# Altium PCB main_pcb.PcbDoc
Units mm, origin at the board's own origin, x right, y up, seen from the top; angles counter-clockwise.
Board outline 111 x 177 mm, 2 copper layers (Top Layer, Bottom Layer); 23 components, 96 nets, 260 pads, 1 vias.
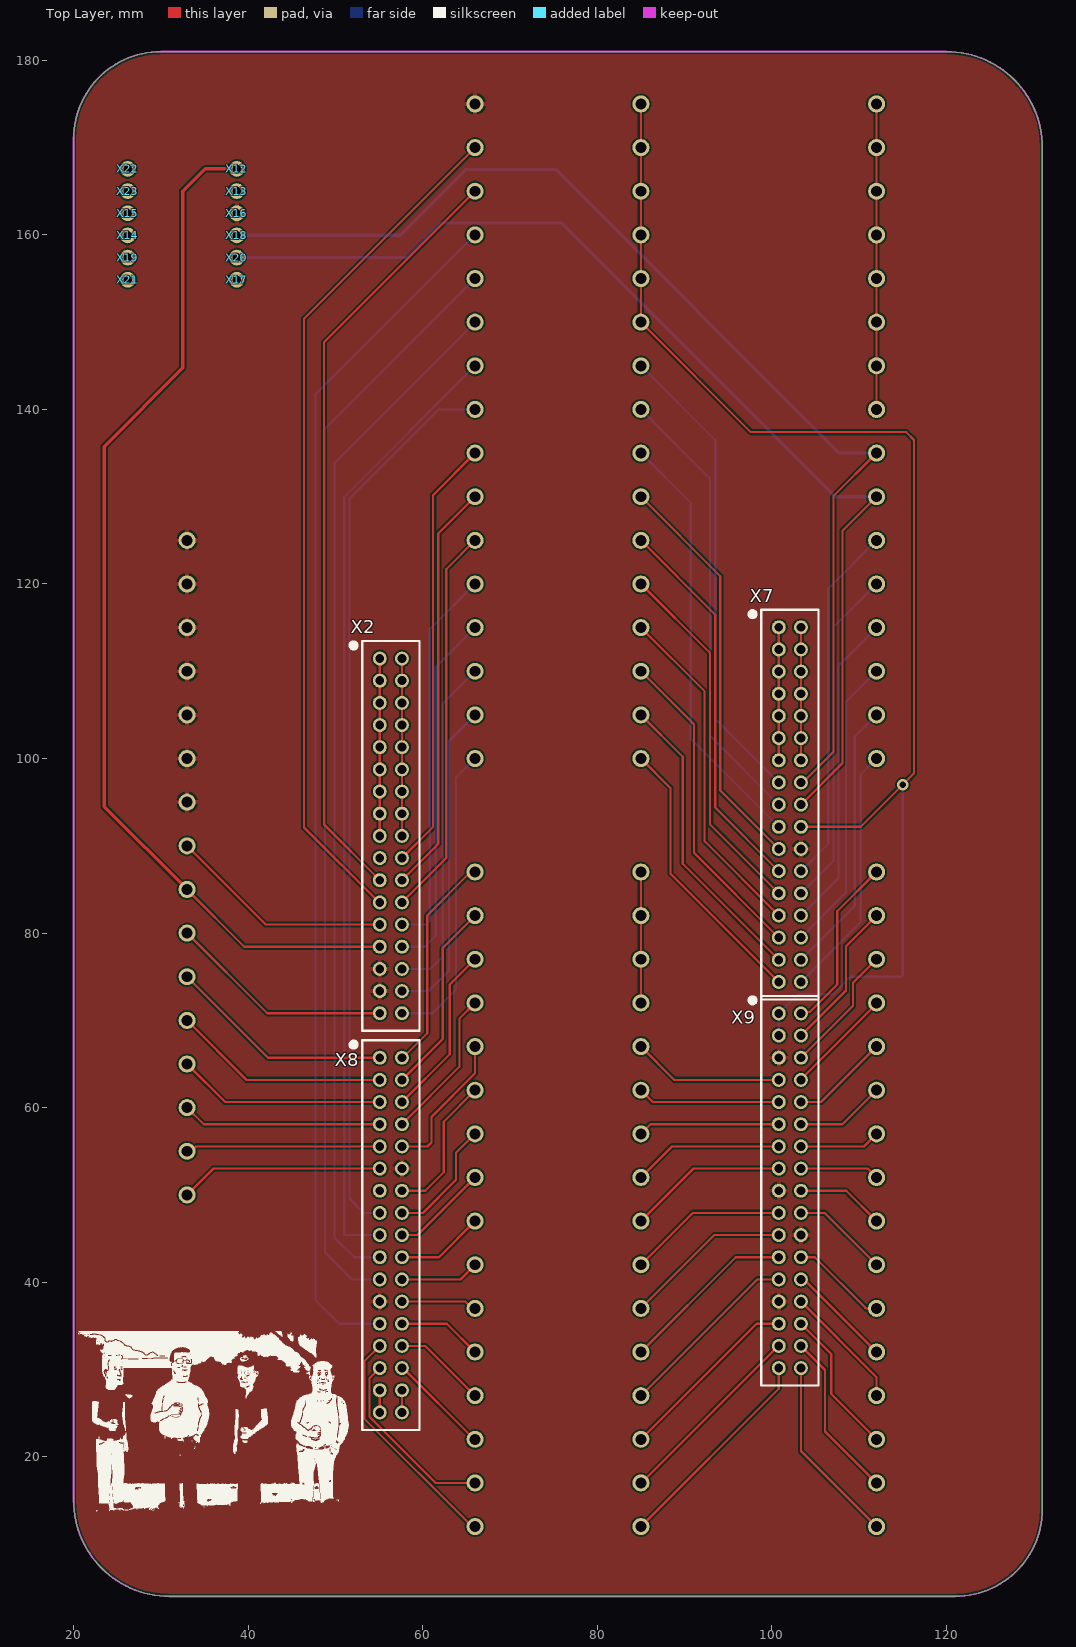
[diagram p0: Top Layer view]
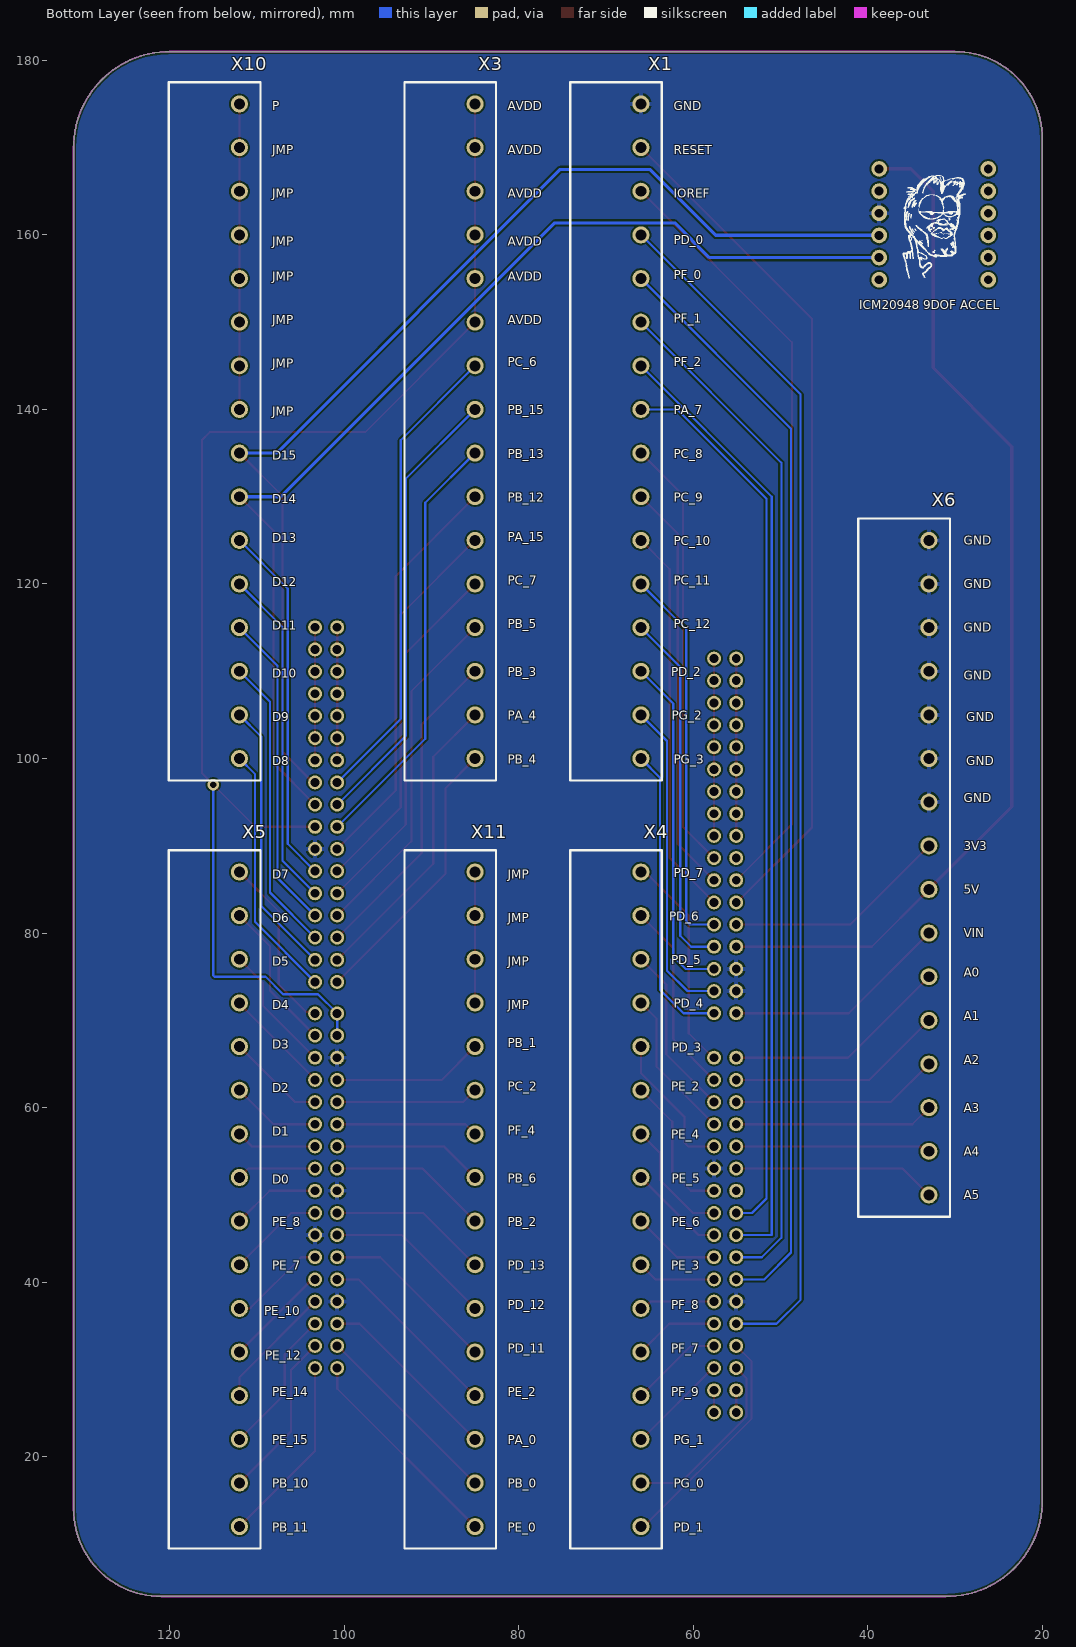
[diagram p1: Bottom Layer view, seen from below]

## Layer stack, top to bottom
Top Solder: solder mask 0.0102, Solder Resist, Dk 3.5
Top Layer: signal copper 0.0356
Dielectric 1: dielectric 0.32, FR-4, Dk 4.8
Bottom Layer: signal copper 0.0356
Bottom Solder: solder mask 0.0102, Solder Resist, Dk 3.5

## Board outline
30,181 120,181 cw(c120,170) 131,170 131,14 cw(c121,14) 121,4 31,4 cw(c31,15) 20,15 20,171 cw(c30,171)

## Design rules (kind name [scope] priority, off if disabled: settings)
BoardOutlineClearance [All] p1: gap=0.3 ignorepadtopadclearanceinfootprint=FALSE except(0.4: Arc-SplitBarrior Arc-SplitContinuation Track-SplitBarrior Track-SplitContinuation SMDPad-SplitBarrior SMDPad-SplitContinuation THPad-SplitBarrior THPad-SplitContinuation Via-SplitBarrior Via-SplitContinuation Fill-SplitBarrior Fill-SplitContinuation Poly-SplitBarrior Poly-SplitContinuation Region-SplitBarrior Region-SplitContinuation Text-SplitBarrior Text-SplitContinuation)
Clearance "Clearance Different Nets" [All] p1: gap=0.2 ignorepadtopadclearanceinfootprint=FALSE except(0.089: Arc-Arc Arc-Track Arc-SMDPad Track-Track Track-SMDPad; 0.127: SMDPad-SMDPad SMDPad-Via THPad-Via Via-Via; 0.254: Arc-Via Arc-Text Track-Via Track-Text SMDPad-Text THPad-Text Via-Text Fill-Text Poly-Text Region-Text Text-Text; 0.5: THPad-THPad Via-Hole)
Clearance "Clearance Same Nets" [All] p2: gap=0.2 ignorepadtopadclearanceinfootprint=FALSE except(0.089: Arc-Arc Arc-Track Arc-SMDPad Track-Track Track-SMDPad SMDPad-SMDPad; 0.127: SMDPad-Via THPad-Via; 0.254: Arc-Via Arc-Text Track-Via Track-Text SMDPad-Text THPad-Text Via-Via Via-Text Fill-Text Poly-Text Region-Text Text-Text)
Clearance "Clearance Bottom Layer" [OnLayer('Bottom Layer')] p3: gap=0.203 ignorepadtopadclearanceinfootprint=TRUE except(0.254: Arc-Text Track-Text SMDPad-Text THPad-Text Via-Text Fill-Text Poly-Text Region-Text Text-Text)
Clearance "Clearance Top Layer" [OnLayer('Top Layer')] p4: gap=0.203 ignorepadtopadclearanceinfootprint=TRUE except(0.254: Arc-Text Track-Text SMDPad-Text THPad-Text Via-Text Fill-Text Poly-Text Region-Text Text-Text)
HoleSize [All] p1: absolutevalues=TRUE maxlimit=6.3 minlimit=0.2 maxpercent=80.000 minpercent=20.000
MinimumAnnularRing [All] p1: minimumring=0.13
MinimumSolderMaskSliver [All] p1: minsoldermaskwidth=0.1
PolygonConnect PolygonConnect_1 [All] p1: thpad.connectstyle=Relief thpad.reliefconductorwidth=0.508 thpad.reliefentries=4 thpad.polygonreliefangle="90 Angle" thpad.airgapwidth=0.254 smdpad.connectstyle=Relief smdpad.reliefconductorwidth=0.508 smdpad.reliefentries=4 smdpad.polygonreliefangle="90 Angle" smdpad.airgapwidth=0.254 via.connectstyle=Direct via.reliefconductorwidth=0.508 via.reliefentries=4 via.polygonreliefangle="90 Angle" via.airgapwidth=0.254
RoutingCorners [All] p1: cornerstyle=Round minsetback=2.54 maxsetback=2.54
RoutingVias [All] p1: holewidth=0.5 width=1 viastyle="Through Hole" minholewidth=0.2 minwidth=0.35 maxholewidth=1 maxwidth=2
SilkToSilkClearance [All] p1: silktosilkclearance=0.1
SilkToSolderMaskClearance [IsPad] p1: minsilkscreentomaskgap=0.1 clearancetoexposedcopper=TRUE
SolderMaskExpansion [All] p1: expansion=0.102 istentingtop=FALSE
Width [All] p1: maxlimit=2.54 minlimit=0.089 preferedwidth=0.381
25 further rules are at their usual default settings.

## Components (designator, comment, footprint, x,y, rotation, side; value= is the part's Value field where it differs from the comment)
X1 "TERM BLOCK 16POS 45DEG 5MM PCB" PHEONIX-1988943 66,100 r0 bottom
X2 "" 2x17PinHeader_0.1in 55.08,111.46 r270 top
X3 "TERM BLOCK 16POS 45DEG 5MM PCB" PHEONIX-1988943 85,100 r0 bottom
X4 "TERM BLOCK 16POS 45DEG 5MM PCB" PHEONIX-1988943 66,12 r0 bottom
X5 "TERM BLOCK 16POS 45DEG 5MM PCB" PHEONIX-1988943 112,12 r0 bottom
X6 "TERM BLOCK 16POS 45DEG 5MM PCB" PHEONIX-1988943 33,50 r0 bottom
X7 "" 2x17PinHeader_0.1in 100.8,115.04 r270 top
X8 "" 2x17PinHeader_0.1in 55.08,65.72 r270 top
X9 "" 2x17PinHeader_0.1in 100.8,70.8 r270 top
X10 "TERM BLOCK 16POS 45DEG 5MM PCB" PHEONIX-1988943 112,100 r0 bottom
X11 "TERM BLOCK 16POS 45DEG 5MM PCB" PHEONIX-1988943 85,12 r0 bottom
X12 "GenericPinHeader(0.1in)" GenericPinHeader(.1in) 38.7,167.56 r0 top
X13 "GenericPinHeader(0.1in)" GenericPinHeader(.1in) 38.7,165.02 r0 top
X14 "GenericPinHeader(0.1in)" GenericPinHeader(.1in) 26.2,159.94 r0 top
X15 "GenericPinHeader(0.1in)" GenericPinHeader(.1in) 26.2,162.48 r0 top
X16 "GenericPinHeader(0.1in)" GenericPinHeader(.1in) 38.7,162.48 r0 top
X17 "GenericPinHeader(0.1in)" GenericPinHeader(.1in) 38.7,154.86 r0 top
X18 "GenericPinHeader(0.1in)" GenericPinHeader(.1in) 38.7,159.94 r0 top
X19 "GenericPinHeader(0.1in)" GenericPinHeader(.1in) 26.2,157.4 r0 top
X20 "GenericPinHeader(0.1in)" GenericPinHeader(.1in) 38.7,157.4 r0 top
X21 "GenericPinHeader(0.1in)" GenericPinHeader(.1in) 26.2,154.86 r0 top
X22 "GenericPinHeader(0.1in)" GenericPinHeader(.1in) 26.2,167.56 r0 top
X23 "GenericPinHeader(0.1in)" GenericPinHeader(.1in) 26.2,165.02 r0 top

## Footprints (in the part's own frame and the unit in brackets; to place one, negate y for a bottom-side part, rotate by r counter-clockwise, add the part's x,y. Pads: shape width x height; smd on the part's side, far side on the other; paste and mask are expansions set on the pad)
2x17PinHeader_0.1in [mm] "Generic 2x17 (34pin) 0.1mm pitch pin header"
  round 1.6 hole 1.02: 1(0,0) 2(2.54,0) 3(5.08,0) 4(7.62,0) 5(10.16,0) 6(12.7,0) 7(15.24,0) 8(17.78,0) 9(20.32,0) 10(22.86,0) 11(25.4,0) 12(27.94,0) 13(30.48,0) 14(33.02,0) 15(35.56,0) 16(38.1,0) 17(40.64,0) 18(40.64,2.54) 19(38.1,2.54) 20(35.56,2.54) 21(33.02,2.54) 22(30.48,2.54) 23(27.94,2.54) 24(25.4,2.54) 25(22.86,2.54) 26(20.32,2.54) 27(17.78,2.54) 28(15.24,2.54) 29(12.7,2.54) 30(10.16,2.54) 31(7.62,2.54) 32(5.08,2.54) 33(2.54,2.54) 34(0,2.54)
  silkscreen extent -2,-3.07 42.64,4.54
GenericPinHeader(.1in) [mm] "Generic .1in (2.54mm) pin header"
  round 1.8 hole 1.016: 1(0,0)
  body extent -1.27,-1.27 1.27,1.27, height 9.5
PHEONIX-1988943 [mm] "TERM BLOCK 16POS 45DEG 5MM PCB"
  round 1.95 hole 1.25: 1(0,0) 2(0,-5) 3(0,-10) 4(0,-15) 5(0,-20) 6(0,-25) 7(0,-30) 8(0,-35) 9(0,-40) 10(0,-45) 11(0,-50) 12(0,-55) 13(0,-60) 14(0,-65) 15(0,-70) 16(0,-75)
  silkscreen extent -2.4,-77.5 8.1,2.5

## Part data
X1 X3 X4 X5 X6 X10 X11: library part PHEONIX-1988943, "16 Position Wire to Board Terminal Block 45° (135°) Angle with Board 0.197\" (5.00mm) Through Hole", ComponentLink1Description=DIGIKEY, ComponentLink1URL=https://www.digikey.com/en/products/detail/phoenix-contact/1988943/950906
X2 X7 X8 X9: library part 2x17_0.1in, "Generic 2x17 0.1in pitch pin header"
X12 X13 X14 X15 X16 X17 X18 X19 X20 X21 X22 X23: "Generic .1in(2.54mm) pitch pin header"

## Via types
v1: diameter 1.27, hole 0.711, Top Layer to Bottom Layer, 1 vias

## Nets (pads, with @x,y where several pads share a name; then routed paths per layer and width w, separated by ;. In a path a pad name is that pad's centre, name@x,y a point inside that pad or via, vN(x,y) a via of type N, cw(c..) or ccw(c..) an arc to the next point about the centre after c; other vN are vias at no path point)
+3V3: X2.13 X6.9 | length 25.8
  Top Layer w0.254: X6.9 42.02,80.98 X2.13
+5V: X2.14 X6.8 X12.1 | length 119.7
  Top Layer w0.254: X6.8 39.56,78.44 X2.14
  Top Layer w0.381: X6.8 23.5,94.5 23.5,135.75 32.5,144.75 32.5,165 35.06,167.56 X12.1
AVDD: X3.11 X3.12 X3.13 X3.14 X3.15 X3.16 X7.25 X9.1 X9.2 | length 156
  Top Layer w0.254: X3.16 X3.15 X3.14 X3.13 X3.12 X3.11 97.6,137.4 115.4,137.4 116.3,136.5 116.3,98.3 v1(115,97) 110.18,92.18 X7.25
  Bottom Layer w0.254: X9.2 X9.1 103,73 107,73 109,75 114.851,75 115,75.149 v1(115,97)
GND: X1.16 X2.15 X2.16 X6.10 X6.11 X6.12 X6.13 X6.14 X6.15 X6.16 X7.24 X8.12 X8.29 X9.3 X9.9 X9.14 X9.24 X16.1
IOREF: X1.14 X2.11 | length 88.7
  Top Layer w0.254: X2.11 48.7,92.44 48.7,147.7 X1.14
NetX2_1: X2.1 X2.2 X2.3 X2.4 X2.5 X2.6 X2.7 X2.8 X2.9 | length 20.3
  Top Layer w0.254: X2.9 X2.8 X2.7 X2.6 X2.5 X2.4 X2.3 X2.2 X2.1
NetX2_26: X2.26 X2.27 X2.28 X2.29 X2.30 X2.31 X2.32 X2.33 X2.34 | length 20.3
  Top Layer w0.254: X2.26 X2.27 X2.28 X2.29 X2.30 X2.31 X2.32 X2.33 X2.34
NetX7_1: X7.1 X7.2 X7.3 X7.4 X7.5 X7.6 X7.7 | length 15.2
  Top Layer w0.254: X7.7 X7.6 X7.5 X7.4 X7.3 X7.2 X7.1
NetX7_28: X7.28 X7.29 X7.30 X7.31 X7.32 X7.33 X7.34 | length 15.2
  Top Layer w0.254: X7.28 X7.29 X7.30 X7.31 X7.32 X7.33 X7.34
NetX8_16: X8.16 X8.17 | length 2.5
  Top Layer w0.254: X8.17 X8.16
NetX8_18: X8.18 X8.19 | length 2.5
  Top Layer w0.254: X8.18 X8.19
NetX10_9: X10.9 X10.10 X10.11 X10.12 X10.13 X10.14 X10.15 X10.16 | length 35
  Top Layer w0.254: X10.9 X10.10 X10.11 X10.12 X10.13 X10.14 X10.15 X10.16
NetX11_13: X11.13 X11.14 X11.15 X11.16 | length 15
  Top Layer w0.254: X11.13 X11.14 X11.15 X11.16
PA_0: X9.15 X11.3 | length 21.3
  Top Layer w0.254: X11.3 98.24,35.24 X9.15
PA_3/A0: X6.6 X8.1 | length 25.9
  Top Layer w0.254: X6.6 42.28,65.72 X8.1
PA_4: X3.2 X7.16 | length 34.6
  Top Layer w0.254: X3.2 89.8,100.2 89.8,87.94 X7.16
PA_5/D13: X7.23 X10.6 | length 41.5
  Bottom Layer w0.254: X7.23 106.469,90.229 106.469,119.469 X10.6
PA_6/D12: X7.22 X10.5 | length 39
  Bottom Layer w0.254: X7.22 107.053,88.273 107.053,115.053 X10.5
PA_7: X1.9 X8.8 | length 103
  Bottom Layer w0.254: X8.8 53.26,47.94 51.6,49.6 51.6,129.774 61.826,140 X1.9
PA_7/D11: X7.21 X10.4 | length 36.6
  Bottom Layer w0.254: X7.21 107.637,86.317 107.637,110.637 X10.4
PA_15: X3.6 X7.12 | length 44.4
  Top Layer w0.254: X3.6 93.517,116.483 93.517,94.383 X7.12
PB_0: X9.16 X11.2 | length 22.3
  Top Layer w0.254: X11.2 85.05,17 100.75,32.7 X9.16
PB_1: X9.4 X11.12 | length 17.4
  Top Layer w0.254: X11.12 88.82,63.18 X9.4
PB_2: X9.8 X11.8 | length 18.3
  Top Layer w0.254: X11.8 91.02,53.02 X9.8
PB_3: X3.3 X7.15 | length 37.1
  Top Layer w0.254: X3.3 91.1,103.9 91.1,89.18 X7.15
PB_4: X3.1 X7.17 | length 32.1
  Top Layer w0.254: X3.1 88.4,96.6 88.4,86.8 X7.17
PB_5: X3.4 X7.14 | length 39.5
  Top Layer w0.254: X3.4 92.3,107.7 92.3,90.52 X7.14
PB_6: X9.7 X11.9 | length 17.3
  Top Layer w0.254: X11.9 88.56,55.56 X9.7
PB_8/D15: X7.27 X10.8 X18.1 | length 131.3
  Top Layer w0.254: X7.27 103.56,97.26 107.053,100.753 107.053,130.053 X10.8
  Bottom Layer w0.381: X18.1 57.44,159.94 65,167.5 75.25,167.5 107.75,135 X10.8
PB_9/D14: X7.26 X10.7 X20.1 | length 126.8
  Top Layer w0.254: X7.26 108.1,99.48 108.1,126.1 X10.7
  Bottom Layer w0.381: X20.1 58.15,157.4 62.115,161.365 75.885,161.365 107.25,130 X10.7
PB_10: X5.2 X9.19 | length 19.3
  Top Layer w0.254: X9.19 106.1,29.94 106.1,22.9 X5.2
PB_11: X5.1 X9.18 | length 21.7
  Top Layer w0.254: X9.18 103.34,20.66 X5.1
PB_12: X3.7 X7.11 | length 46.9
  Top Layer w0.254: X3.7 94.101,120.899 94.101,96.339 X7.11
PB_13: X3.8 X7.10 | length 49.4
  Bottom Layer w0.254: X3.8 90.7,129.3 90.7,102.28 X7.10
PB_15: X3.9 X7.9 | length 51.8
  Bottom Layer w0.254: X3.9 92.933,132.067 92.933,102.587 X7.9
PC_0/A1: X6.5 X8.2 | length 24.9
  Top Layer w0.254: X6.5 39.82,63.18 X8.2
PC_2: X9.5 X11.11 | length 16.4
  Top Layer w0.254: X11.11 86.36,60.64 X9.5
PC_3/A2: X6.4 X8.3 | length 23.9
  Top Layer w0.254: X6.4 37.36,60.64 X8.3
PC_6: X3.10 X7.8 | length 54.3
  Bottom Layer w0.254: X3.10 93.517,136.483 93.517,104.543 X7.8
PC_7: X3.5 X7.13 | length 42
  Top Layer w0.254: X3.5 92.933,112.067 92.933,92.427 X7.13
PC_8: X1.8 X2.25 | length 49.9
  Top Layer w0.254: X2.25 61.193,92.173 61.193,130.193 X1.8
PC_9: X1.7 X2.24 | length 47.4
  Top Layer w0.254: X2.24 61.777,90.217 61.777,125.777 X1.7
PC_10: X1.6 X2.23 | length 45
  Top Layer w0.254: X2.23 62.7,88.6 62.7,121.7 X1.6
PC_11: X1.5 X2.22 | length 44.1
  Bottom Layer w0.254: X2.22 60.38,80.98 60.8,81.4 60.8,114.8 X1.5
PC_12: X1.4 X2.21 | length 41.6
  Bottom Layer w0.254: X2.21 60.24,78.44 61.5,79.7 61.5,110.5 X1.4
PD_0: X1.13 X8.13 | length 138.1
  Bottom Layer w0.254: X8.13 50.46,35.24 47.7,38 47.7,141.7 X1.13
PD_1: X4.1 X8.14 | length 26.9
  Top Layer w0.254: X8.14 53.315,30.935 53.315,24.349 65.664,12 X4.1
PD_2: X1.3 X2.20 | length 39.5
  Bottom Layer w0.254: X2.20 60.9,75.9 62.3,77.3 62.3,106.3 X1.3
PD_3: X4.12 X8.30 | length 16.6
  Top Layer w0.254: X8.30 60.56,55.56 61,56 61,58.94 66,63.94 X4.12
PD_4: X4.13 X8.31 | length 17.4
  Top Layer w0.254: X8.31 64.2,64.68 64.2,70.2 X4.13
PD_5: X4.14 X8.32 | length 19.8
  Top Layer w0.254: X8.32 63.1,66.12 63.1,74.1 X4.14
PD_6: X4.15 X8.33 | length 22.3
  Top Layer w0.254: X8.33 62.3,67.86 62.3,78.3 X4.15
PD_7: X4.16 X8.34 | length 25.1
  Top Layer w0.254: X8.34 57.72,65.72 60.522,68.522 60.522,82.022 65.175,86.675 65.675,86.675 X4.16
PD_11: X9.12 X11.5 | length 20.3
  Top Layer w0.254: X11.5 95.86,42.86 X9.12
PD_12: X9.11 X11.6 | length 19.3
  Top Layer w0.254: X11.6 93.4,45.4 X9.11
PD_13: X9.10 X11.7 | length 18.3
  Top Layer w0.254: X11.7 90.94,47.94 X9.10
PD_14/D10: X7.20 X10.3 | length 34.1
  Bottom Layer w0.254: X7.20 108.5,84.64 108.5,106.5 X10.3
PD_15/D9: X7.19 X10.2 | length 31.6
  Bottom Layer w0.254: X7.19 109.5,83.1 109.5,102.5 X10.2
PE_0: X9.17 X11.1 | length 24.7
  Top Layer w0.254: X11.1 100.8,27.8 X9.17
PE_2: X9.13 X11.4 | length 21.3
  Top Layer w0.254: X11.4 98.32,40.32 X9.13
PE_2/D57: X4.11 X8.28 | length 16.5
  Top Layer w0.254: X8.28 60.28,50.48 62.4,52.6 62.4,58.4 X4.11
PE_3: X4.7 X8.24 | length 9.1
  Top Layer w0.254: X8.24 64.32,40.32 X4.7
PE_4: X4.10 X8.27 | length 13.9
  Top Layer w0.254: X8.27 60.04,47.94 63.8,51.7 63.8,54.8 X4.10
PE_5: X4.9 X8.26 | length 11.1
  Top Layer w0.254: X8.26 59.4,45.4 X4.9
PE_6: X4.8 X8.25 | length 10.1
  Top Layer w0.254: X8.25 61.86,42.86 X4.8
PE_7: X5.7 X9.25 | length 11.1
  Top Layer w0.254: X9.25 106.06,47.94 X5.7
PE_8: X5.8 X9.26 | length 10.1
  Top Layer w0.254: X9.26 108.52,50.48 X5.8
PE_9/D6: X5.15 X9.33 | length 17.3
  Top Layer w0.254: X9.33 108.5,73.42 108.5,78.5 X5.15
PE_10: X5.6 X9.23 | length 11.1
  Top Layer w0.254: X9.23 104.94,42.86 104.99,42.81 110.648,37.152 110.698,37.102 110.701,37.085 110.786,37 X5.6
PE_11/D5: X5.14 X9.32 | length 14.9
  Top Layer w0.254: X9.32 109.3,71.68 109.3,74.3 X5.14
PE_12: X5.5 X9.22 | length 12.1
  Top Layer w0.254: X9.22 103.68,40.32 X5.5
PE_13/D3: X5.12 X9.30 | length 11.3
  Top Layer w0.254: X9.30 105.64,60.64 X5.12
PE_14: X5.4 X9.21 | length 14.4
  Top Layer w0.254: X9.21 112,29.12 X5.4
PE_15: X5.3 X9.20 | length 16.8
  Top Layer w0.254: X9.20 106.8,31.78 106.8,27.2 X5.3
PF_0: X1.12 X8.11 | length 126.3
  Bottom Layer w0.254: X8.11 51.88,40.32 48.8,43.4 48.8,137.8 X1.12
PF_1: X1.11 X8.10 | length 117.7
  Bottom Layer w0.254: X8.10 52.14,42.86 49.905,45.095 49.905,133.905 X1.11
PF_2: X1.10 X8.9 | length 109.9
  Bottom Layer w0.254: X8.9 51,45.4 51,130 X1.10
PF_3/A3: X6.3 X8.4 | length 22.9
  Top Layer w0.254: X6.3 34.9,58.1 X8.4
PF_4: X9.6 X11.10 | length 16.3
  Top Layer w0.254: X11.10 86.1,58.1 X9.6
PF_5/A4: X6.2 X8.5 | length 22.3
  Top Layer w0.254: X6.2 33.459,55 34.019,55.56 X8.5
PF_7: X4.5 X8.22 | length 9.7
  Top Layer w0.254: X8.22 62.76,35.24 X4.5
PF_8: X4.6 X8.23 | length 8.7
  Top Layer w0.254: X8.23 64.862,37.78 65.642,37 X4.6
PF_9: X4.4 X8.21 | length 10.7
  Top Layer w0.254: X8.21 60.3,32.7 X4.4
PF_10/A5: X6.1 X8.6 | length 23.3
  Top Layer w0.254: X6.1 36.02,53.02 X8.6
PF_12/D8: X7.18 X10.1 | length 29.2
  Bottom Layer w0.254: X7.18 110.2,81.26 110.2,98.2 X10.1
PF_13/D7: X5.16 X9.34 | length 20.3
  Top Layer w0.254: X9.34 103.491,70.951 104.351,70.951 107.5,74.1 107.5,82.5 X5.16
PF_14/D4: X5.13 X9.31 | length 12.4
  Top Layer w0.254: X9.31 103.34,63.26 112,71.92 X5.13
PF_15/D2: X5.11 X9.29 | length 10.3
  Top Layer w0.254: X9.29 108.1,58.1 X5.11
PG_0: X4.2 X8.15 | length 21.3
  Top Layer w0.254: X8.15 53.899,28.979 53.899,24.591 61.49,17 X4.2
PG_1: X4.3 X8.20 | length 11.8
  Top Layer w0.254: X8.20 57.73,30.16 65.89,22 X4.3
PG_2: X1.2 X2.19 | length 36.9
  Bottom Layer w0.254: X2.19 60.66,73.36 63,75.7 63,102 X1.2
PG_3: X1.1 X2.18 | length 34.7
  Bottom Layer w0.254: X2.18 61.12,70.82 63.8,73.5 63.8,97.8 X1.1
PG_9/D0: X5.9 X9.27 | length 9.1
  Top Layer w0.254: X9.27 110.98,53.02 X5.9
PG_14/D1: X5.10 X9.28 | length 9.3
  Top Layer w0.254: X9.28 110.56,55.56 X5.10
RESET: X1.15 X2.12 | length 98.2
  Top Layer w0.254: X2.12 54.98,83.52 46.405,92.095 46.405,150.405 X1.15
VIN: X2.17 X6.7 | length 25.9
  Top Layer w0.254: X6.7 42.18,70.82 X2.17
pads on no net: X2.10 X8.7 X13.1 X14.1 X15.1 X17.1 X19.1 X21.1 X22.1 X23.1

## Polygon pours and split planes (outlines as drawn)
GND on Bottom Layer "GND_L02_P001" (solid, pour order 1): 16,184 16,4 140,4 140,184
GND on Top Layer "GND_L01_P002" (solid, pour order 2): 15,189 15,4 141,4 141,189

## Keep-outs
Keep-Out Layer:
  the board outline again, w0.2

## Silkscreen, mask and mechanical layers (free items; w line width, h text height)
Top Overlay:
  drawing of 156 lines, arcs and shapes, not listed
Bottom Overlay:
  drawing of 43 lines, arcs and shapes, not listed
  text "GND" at 62.246,174.254 h1
  text "AVDD" at 81.246,174.254 h1
  text "P" at 108.246,174.254 h1
  text "RESET" at 62.246,169.254 h1
  text "AVDD" at 81.246,169.254 h1
  text "JMP" at 108.246,169.254 h1
  text "IOREF" at 62.246,164.254 h1
  text "AVDD" at 81.246,164.254 h1
  text "JMP" at 108.246,164.254 h1
  text "PD_0" at 62.246,158.921 h1
  text "AVDD" at 81.246,158.754 h1
  text "JMP" at 108.246,158.754 h1
  text "PF_0" at 62.246,154.921 h1
  text "AVDD" at 81.246,154.754 h1
  text "JMP" at 108.246,154.754 h1
  text "ICM20948 9DOF ACCEL" at 40.996,151.504 h1
  text "PF_1" at 62.246,149.921 h1
  text "AVDD" at 81.246,149.754 h1
  text "JMP" at 108.246,149.754 h1
  text "PF_2" at 62.246,144.921 h1
  text "PC_6" at 81.246,144.921 h1
  text "JMP" at 108.246,144.754 h1
  text "PA_7" at 62.246,139.421 h1
  text "PB_15" at 81.246,139.421 h1
  text "JMP" at 108.246,139.254 h1
  text "PC_8" at 62.246,134.421 h1
  text "PB_13" at 81.246,134.421 h1
  text "D15" at 108.246,134.254 h1
  text "PC_9" at 62.246,129.421 h1
  text "PB_12" at 81.246,129.421 h1
  text "D14" at 108.246,129.254 h1
  text "PA_15" at 81.246,124.921 h1
  text "D13" at 108.246,124.754 h1
  text "GND" at 29,124.5 h1
  text "PC_10" at 62.246,124.421 h1
  text "PC_11" at 62.246,119.921 h1
  text "PC_7" at 81.246,119.921 h1
  text "D12" at 108.246,119.754 h1
  text "GND" at 29,119.5 h1
  text "PC_12" at 62.246,114.921 h1
  text "PB_5" at 81.246,114.921 h1
  text "D11" at 108.246,114.754 h1
  text "GND" at 29,114.5 h1
  text "PD_2" at 62.546,109.421 h1
  text "PB_3" at 81.246,109.421 h1
  text "D10" at 108.246,109.254 h1
  text "GND" at 29,109 h1
  text "PG_2" at 62.446,104.421 h1
  text "PA_4" at 81.246,104.421 h1
  text "GND" at 28.746,104.254 h1
  text "D9" at 108.246,104.254 h1
  text "PG_3" at 62.246,99.421 h1
  text "PB_4" at 81.246,99.421 h1
  text "GND" at 28.746,99.254 h1
  text "D8" at 108.246,99.254 h1
  text "GND" at 29,95 h1
  text "3V3" at 29,89.5 h1
  text "PD_7" at 62.246,86.421 h1
  text "JMP" at 81.246,86.254 h1
  text "D7" at 108.246,86.254 h1
  text "5V" at 29,84.5 h1
  text "PD_6" at 62.746,81.421 h1
  text "JMP" at 81.246,81.254 h1
  text "D6" at 108.246,81.254 h1
  text "VIN" at 29,79.5 h1
  text "PD_5" at 62.546,76.421 h1
  text "JMP" at 81.246,76.254 h1
  text "D5" at 108.246,76.254 h1
  text "A0" at 29,75 h1
  text "PD_4" at 62.246,71.421 h1
  text "JMP" at 81.246,71.254 h1
  text "D4" at 108.246,71.254 h1
  text "A1" at 29,70 h1
  text "PB_1" at 81.246,66.921 h1
  text "D3" at 108.246,66.754 h1
  text "PD_3" at 62.446,66.421 h1
  text "A2" at 29,65 h1
  text "PE_2" at 62.546,61.921 h1
  text "PC_2" at 81.246,61.921 h1
  text "D2" at 108.246,61.754 h1
  text "A3" at 29,59.5 h1
  text "PF_4" at 81.246,56.921 h1
  text "D1" at 108.246,56.754 h1
  text "PE_4" at 62.546,56.421 h1
  text "A4" at 29,54.5 h1
  text "PE_5" at 62.446,51.421 h1
  text "PB_6" at 81.246,51.421 h1
  text "D0" at 108.246,51.254 h1
  text "A5" at 29,49.5 h1
  text "PE_6" at 62.446,46.421 h1
  text "PB_2" at 81.246,46.421 h1
  text "PE_8" at 108.246,46.421 h1
  text "PE_3" at 62.546,41.421 h1
  text "PD_13" at 81.246,41.421 h1
  text "PE_7" at 108.246,41.421 h1
  text "PF_8" at 62.546,36.921 h1
  text "PD_12" at 81.246,36.921 h1
  text "PE_10" at 109.146,36.221 h1
  text "PF_7" at 62.546,31.921 h1
  text "PD_11" at 81.246,31.921 h1
  text "PE_12" at 109.046,31.121 h1
  text "PF_9" at 62.546,26.921 h1
  text "PE_2" at 81.246,26.921 h1
  text "PE_14" at 108.246,26.921 h1
  text "PG_1" at 62.246,21.421 h1
  text "PA_0" at 81.246,21.421 h1
  text "PE_15" at 108.246,21.421 h1
  text "PG_0" at 62.246,16.421 h1
  text "PB_0" at 81.246,16.421 h1
  text "PB_10" at 108.246,16.421 h1
  text "PD_1" at 62.246,11.421 h1
  text "PE_0" at 81.246,11.421 h1
  text "PB_11" at 108.246,11.421 h1
Mechanical 16:
  lines w0.254: 55.08,30.16 103.34,30.16 ; 57.62,65.72 57.62,70.82 ; 103.34,70.8 103.34,74.4